# Altium PCB 电子脚铐手持式主控板V3.PcbDoc (part 3 of 3)
Units mm, origin at the board's own origin, x right, y up, seen from the top; angles counter-clockwise.
Board outline 100 x 95 mm, 2 copper layers (Top Layer, Bottom Layer); 124 components, 70 nets, 370 pads, 89 vias.
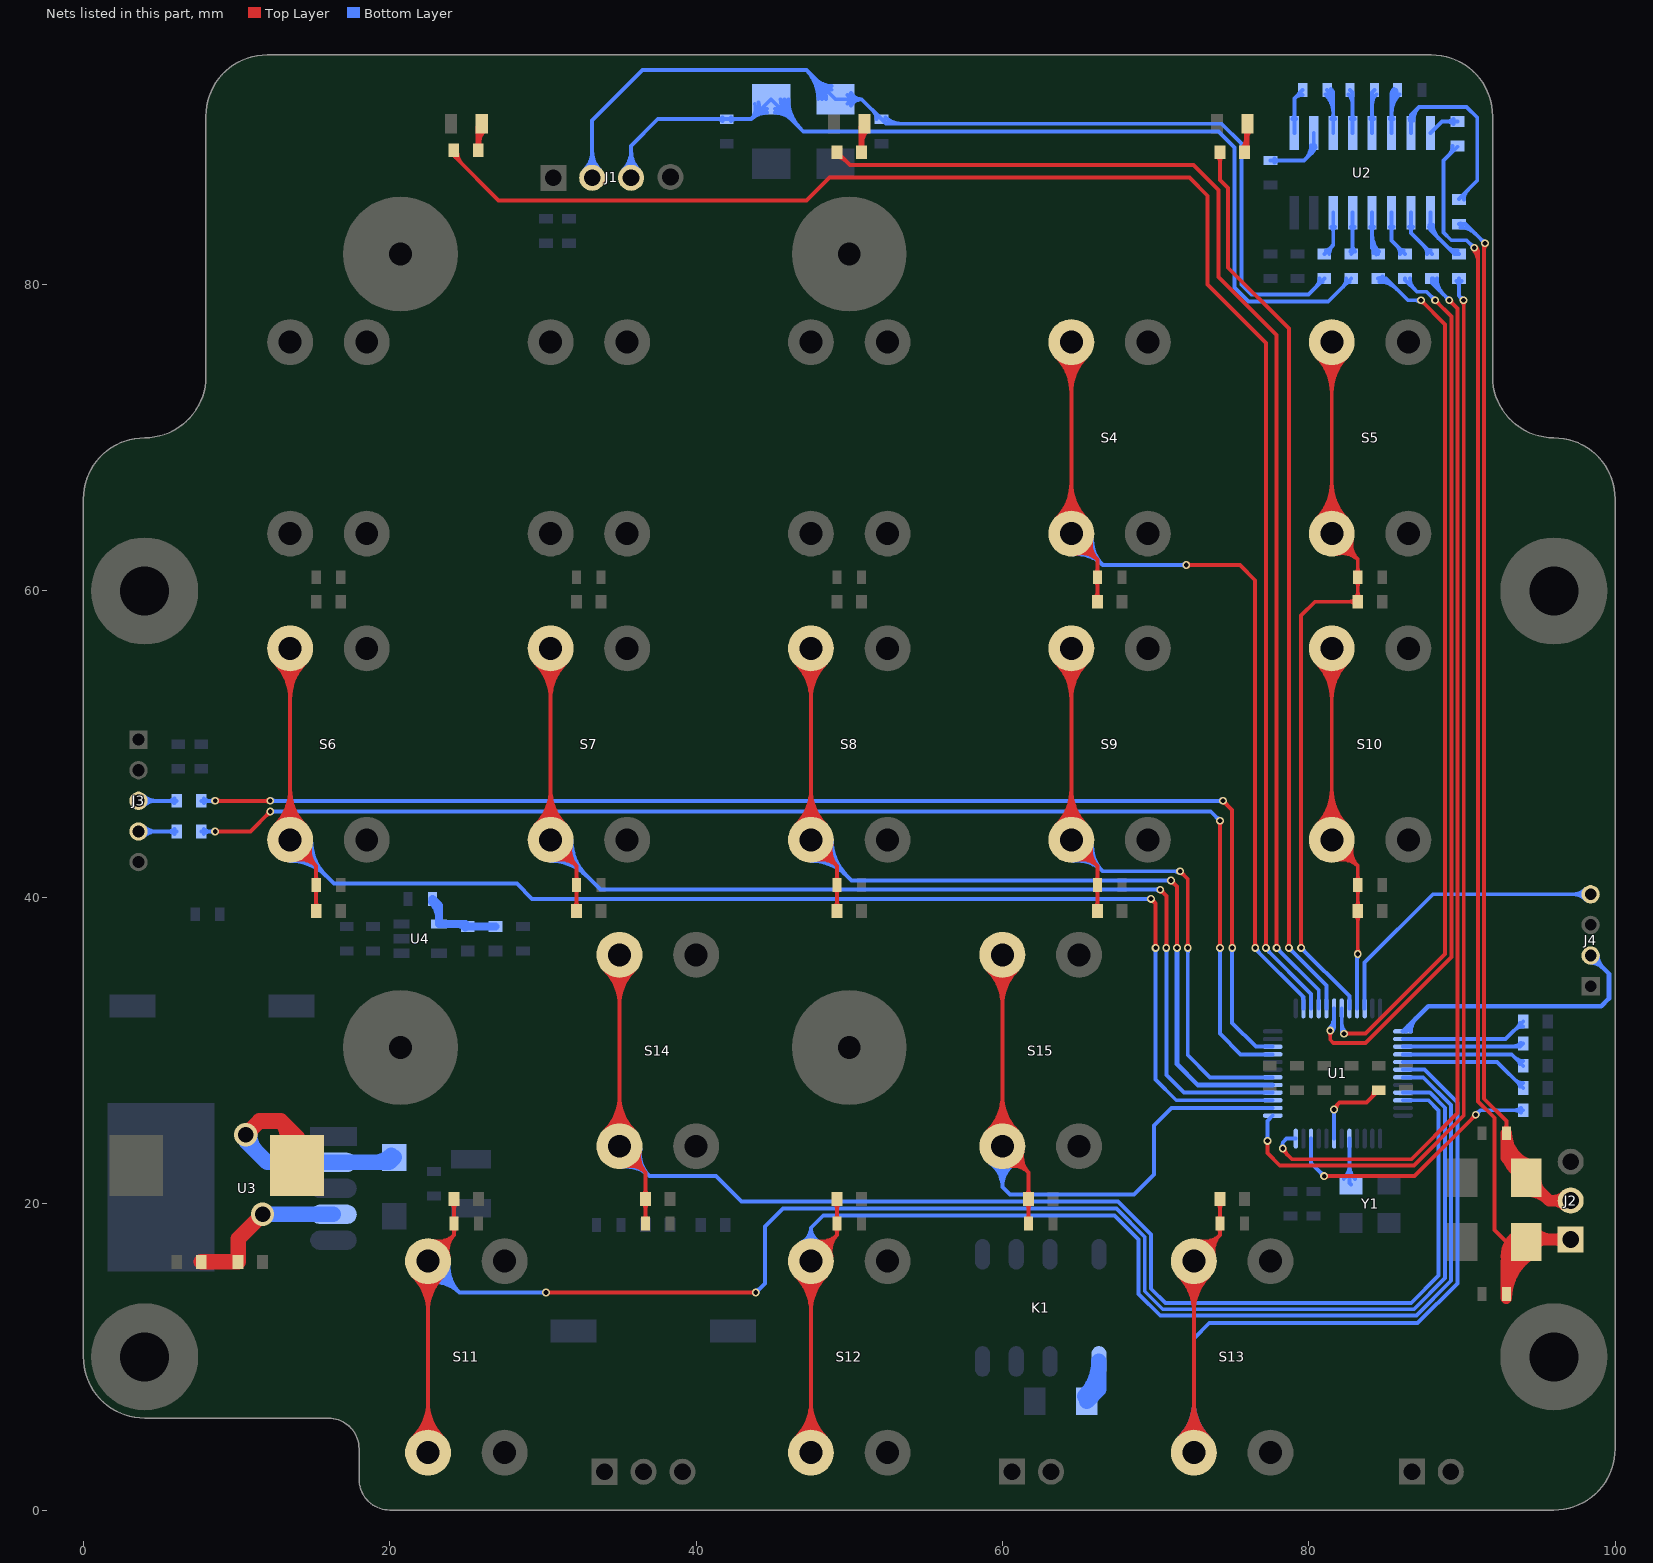
[diagram p3: the nets of this part, all layers, seen from the top]

## Via types
v1: diameter 0.508, hole 0.305, Top Layer to Bottom Layer, tented both sides, 75 vias
v2: diameter 0.762, hole 0.508, Top Layer to Bottom Layer, tented both sides, 9 vias
v3: diameter 1.524, hole 1.016, Top Layer to Bottom Layer, tented both sides, 5 vias

## Nets (pads, with @x,y where several pads share a name; then routed paths per layer and width w, separated by ;. In a path a pad name is that pad's centre, name@x,y a point inside that pad or via, vN(x,y) a via of type N, cw(c..) or ccw(c..) an arc to the next point about the centre after c; other vN are vias at no path point) (continued)
KEY3: C33.1 R23.1 S4.2 U1.26 | length 107.5
  Top Layer w0.254: S4.2@63.529,64.721 ccw(c61.185,67.065) 64.5,67.065 ccw(c67.815,67.065) S4.2@65.471,64.721 ; S4.2@63.529,75.279 cw(c61.185,72.935) 64.5,72.935 cw(c67.815,72.935) S4.2@65.471,75.279 ; S4.2@63.709,64.541 ccw(c61.799,66.451) 64.5,66.451 ccw(c67.202,66.451) S4.2@65.291,64.541 ; S4.2@63.709,75.459 cw(c61.799,73.548) 64.5,73.548 cw(c67.202,73.548) S4.2@65.291,75.459 ; S4.2@63.889,64.361 ccw(c62.412,65.838) 64.5,65.838 ccw(c66.588,65.838) S4.2@65.112,64.361 ; S4.2@63.889,75.638 cw(c62.412,74.162) 64.5,74.162 cw(c66.588,74.162) S4.2@65.112,75.638 ; S4.2@64.5,76.25 S4.2@64.5,63.75 66.2,62.05 ; S4.2@64.716,62.912 cw(c64.939,62.047) 65.571,62.679 cw(c66.203,63.311) S4.2@65.338,63.534 ; S4.2@64.78,62.666 cw(c65.068,61.547) 65.885,62.365 cw(c66.703,63.182) S4.2@65.584,63.47 ; S4.2@64.843,62.42 cw(c65.197,61.048) 66.2,62.05 ; S4.2@65.83,63.407 ccw(c67.202,63.053) 66.2,62.05 ; R23.1@66.042,59.558 ccw(c65.662,59.938) 66.2,59.938 ccw(c66.738,59.938) R23.1@66.358,59.558 ; C33.1@66.078,60.628 cw(c65.782,60.332) 66.2,60.332 cw(c66.618,60.332) C33.1@66.322,60.628 ; C33.1@66.078,61.172 ccw(c65.782,61.468) 66.2,61.468 ccw(c66.618,61.468) C33.1@66.322,61.172 ; R23.1@66.2,59.3 C33.1@66.2,60.9 66.2,62.05 ; v1(72,61.7) 75.5,61.7 76.5,60.7 v1(76.5,36.7) ; v1@72.09,61.61 cw(c72.307,61.393) 72.307,61.7 cw(c72.307,62.007) v1@72.09,61.79 ; v1@76.41,36.79 ccw(c76.193,37.007) 76.5,37.007 ccw(c76.807,37.007) v1@76.59,36.79
  Bottom Layer w0.254: S4.2@64.5,63.75 66.55,61.7 v1(72,61.7) ; S4.2@64.586,62.889 cw(c64.734,61.401) 65.792,62.458 cw(c66.849,63.516) S4.2@65.361,63.664 ; S4.2@64.611,62.636 cw(c64.803,60.711) 66.171,62.079 cw(c67.539,63.447) S4.2@65.614,63.639 ; S4.2@64.636,62.384 cw(c64.872,60.022) 66.55,61.7 cw(c68.228,63.378) S4.2@65.866,63.614 ; v1@71.91,61.61 ccw(c71.693,61.393) 71.693,61.7 ccw(c71.693,62.007) v1@71.91,61.79 ; v1(76.5,36.7) 76.5,36.646 79.65,33.496 U1.26@79.65,32.75 ; v1@76.627,36.7 ccw(c77.065,36.7) 76.755,36.39 ; 79.461,33.684 cw(c79.037,33.26) U1.26@79.637,33.26
KEY4: C34.1 R24.1 S5.2 U1.32 | length 85.3
  Top Layer w0.254: v1@79.41,36.79 ccw(c79.193,37.007) 79.5,37.007 ccw(c79.807,37.007) v1@79.59,36.79 ; v1(79.5,36.7) 79.5,58.4 80.4,59.3 R24.1@83.2,59.3 C34.1@83.2,60.9 83.2,62.05 ; S5.2@80.529,64.721 ccw(c78.185,67.065) 81.5,67.065 ccw(c84.815,67.065) S5.2@82.471,64.721 ; S5.2@80.529,75.279 cw(c78.185,72.935) 81.5,72.935 cw(c84.815,72.935) S5.2@82.471,75.279 ; S5.2@80.709,64.541 ccw(c78.799,66.451) 81.5,66.451 ccw(c84.202,66.451) S5.2@82.291,64.541 ; S5.2@80.709,75.459 cw(c78.799,73.548) 81.5,73.548 cw(c84.202,73.548) S5.2@82.291,75.459 ; S5.2@80.889,64.361 ccw(c79.412,65.838) 81.5,65.838 ccw(c83.588,65.838) S5.2@82.112,64.361 ; S5.2@80.889,75.638 cw(c79.412,74.162) 81.5,74.162 cw(c83.588,74.162) S5.2@82.112,75.638 ; S5.2@81.5,76.25 S5.2@81.5,63.75 83.2,62.05 ; S5.2@81.716,62.912 cw(c81.939,62.047) 82.571,62.679 cw(c83.203,63.311) S5.2@82.338,63.534 ; S5.2@81.78,62.666 cw(c82.068,61.548) 82.885,62.365 cw(c83.702,63.182) S5.2@82.584,63.47 ; S5.2@81.843,62.42 cw(c82.197,61.048) 83.2,62.05 ; S5.2@82.83,63.407 ccw(c84.202,63.053) 83.2,62.05 ; R24.1@83.042,59.142 ccw(c82.662,58.762) 82.662,59.3 ccw(c82.662,59.838) R24.1@83.042,59.458 ; R24.1@83.042,59.558 ccw(c82.662,59.938) 83.2,59.938 ccw(c83.738,59.938) R24.1@83.358,59.558 ; C34.1@83.078,60.628 cw(c82.782,60.332) 83.2,60.332 cw(c83.618,60.332) C34.1@83.322,60.628 ; C34.1@83.078,61.172 ccw(c82.782,61.468) 83.2,61.468 ccw(c83.618,61.468) C34.1@83.322,61.172
  Bottom Layer w0.254: v1@79.5,36.573 cw(c79.5,36.266) 79.717,36.483 cw(c79.934,36.7) v1@79.627,36.7 ; v1(79.5,36.7) 82.65,33.55 U1.32@82.65,32.75
KEY5: C35.1 R25.1 S6.2 U1.15 | length 145.3
  Top Layer w0.254: S6.2@12.529,44.721 ccw(c10.185,47.065) 13.5,47.065 ccw(c16.815,47.065) S6.2@14.471,44.721 ; S6.2@12.529,55.279 cw(c10.185,52.935) 13.5,52.935 cw(c16.815,52.935) S6.2@14.471,55.279 ; S6.2@12.709,44.541 ccw(c10.799,46.451) 13.5,46.451 ccw(c16.202,46.451) S6.2@14.291,44.541 ; S6.2@12.709,55.459 cw(c10.799,53.548) 13.5,53.548 cw(c16.202,53.548) S6.2@14.291,55.459 ; S6.2@12.889,44.361 ccw(c11.412,45.838) 13.5,45.838 ccw(c15.588,45.838) S6.2@14.112,44.361 ; S6.2@12.889,55.638 cw(c11.412,54.162) 13.5,54.162 cw(c15.588,54.162) S6.2@14.112,55.638 ; S6.2@13.5,56.25 S6.2@13.5,43.75 15.2,42.05 ; S6.2@13.716,42.912 cw(c13.939,42.047) 14.571,42.679 cw(c15.203,43.311) S6.2@14.338,43.534 ; S6.2@13.78,42.666 cw(c14.068,41.547) 14.885,42.364 cw(c15.703,43.182) S6.2@14.584,43.47 ; S6.2@13.843,42.42 cw(c14.197,41.047) 15.2,42.05 ; S6.2@14.83,43.407 ccw(c16.203,43.053) 15.2,42.05 ; R25.1@15.042,39.358 ccw(c14.662,39.738) 15.2,39.738 ccw(c15.738,39.738) R25.1@15.358,39.358 ; C35.1@15.078,40.528 cw(c14.782,40.232) 15.2,40.232 cw(c15.618,40.232) C35.1@15.322,40.528 ; C35.1@15.078,41.072 ccw(c14.782,41.368) 15.2,41.368 ccw(c15.618,41.368) C35.1@15.322,41.072 ; R25.1@15.2,39.1 C35.1@15.2,40.8 15.2,42.05 ; v1@69.7,39.773 cw(c69.7,39.466) 69.917,39.683 cw(c70.134,39.9) v1@69.827,39.9 ; v1(69.7,39.9) 70,39.6 v1(70,36.7) ; v1@69.91,36.79 ccw(c69.693,37.007) 70,37.007 ccw(c70.307,37.007) v1@70.09,36.79
  Bottom Layer w0.254: S6.2@13.5,42.377 cw(c13.5,39.062) 15.844,41.406 cw(c18.188,43.75) S6.2@14.873,43.75 ; S6.2@13.5,42.631 cw(c13.5,39.929) 15.41,41.84 cw(c17.321,43.75) S6.2@14.619,43.75 ; S6.2@13.5,42.885 cw(c13.5,40.797) 14.977,42.273 cw(c16.453,43.75) S6.2@14.365,43.75 ; S6.2@13.5,43.75 16.35,40.9 28.3,40.9 29.3,39.9 v1(69.7,39.9) ; v1@69.61,39.81 ccw(c69.393,39.593) 69.393,39.9 ccw(c69.393,40.207) v1@69.61,39.99 ; v1@69.91,36.61 cw(c69.693,36.393) 70,36.393 cw(c70.307,36.393) v1@70.09,36.61 ; v1(70,36.7) 70,28.1 71.35,26.75 U1.15@77.65,26.75
KEY6: C36.1 R26.1 S7.2 U1.16 | length 128.2
  Top Layer w0.254: S7.2@29.529,44.721 ccw(c27.185,47.065) 30.5,47.065 ccw(c33.815,47.065) S7.2@31.471,44.721 ; S7.2@29.529,55.279 cw(c27.185,52.935) 30.5,52.935 cw(c33.815,52.935) S7.2@31.471,55.279 ; S7.2@29.709,44.541 ccw(c27.799,46.451) 30.5,46.451 ccw(c33.202,46.451) S7.2@31.291,44.541 ; S7.2@29.709,55.459 cw(c27.799,53.548) 30.5,53.548 cw(c33.202,53.548) S7.2@31.291,55.459 ; S7.2@29.889,44.361 ccw(c28.412,45.838) 30.5,45.838 ccw(c32.588,45.838) S7.2@31.112,44.361 ; S7.2@29.889,55.638 cw(c28.412,54.162) 30.5,54.162 cw(c32.588,54.162) S7.2@31.112,55.638 ; S7.2@30.5,56.25 S7.2@30.5,43.75 32.2,42.05 ; S7.2@30.716,42.912 cw(c30.939,42.047) 31.571,42.679 cw(c32.203,43.311) S7.2@31.338,43.534 ; S7.2@30.78,42.666 cw(c31.068,41.547) 31.885,42.365 cw(c32.703,43.182) S7.2@31.584,43.47 ; S7.2@30.843,42.42 cw(c31.197,41.048) 32.2,42.05 ; S7.2@31.83,43.407 ccw(c33.202,43.053) 32.2,42.05 ; R26.1@32.042,39.358 ccw(c31.662,39.738) 32.2,39.738 ccw(c32.738,39.738) R26.1@32.358,39.358 ; C36.1@32.078,40.528 cw(c31.782,40.232) 32.2,40.232 cw(c32.618,40.232) C36.1@32.322,40.528 ; C36.1@32.078,41.072 ccw(c31.782,41.368) 32.2,41.368 ccw(c32.618,41.368) C36.1@32.322,41.072 ; R26.1@32.2,39.1 C36.1@32.2,40.8 32.2,42.05 ; v1@70.3,40.373 cw(c70.3,40.066) 70.517,40.283 cw(c70.734,40.5) v1@70.427,40.5 ; v1(70.3,40.5) 70.7,40.1 v1(70.7,36.7) ; v1@70.61,36.79 ccw(c70.393,37.007) 70.7,37.007 ccw(c71.007,37.007) v1@70.79,36.79
  Bottom Layer w0.254: S7.2@30.5,42.377 cw(c30.5,39.062) 32.844,41.406 cw(c35.188,43.75) S7.2@31.873,43.75 ; S7.2@30.5,42.631 cw(c30.5,39.929) 32.41,41.84 cw(c34.321,43.75) S7.2@31.619,43.75 ; S7.2@30.5,42.885 cw(c30.5,40.797) 31.977,42.273 cw(c33.453,43.75) S7.2@31.365,43.75 ; S7.2@30.5,43.75 33.75,40.5 v1(70.3,40.5) ; v1@70.21,40.41 ccw(c69.993,40.193) 69.993,40.5 ccw(c69.993,40.807) v1@70.21,40.59 ; v1@70.61,36.61 cw(c70.393,36.393) 70.7,36.393 cw(c71.007,36.393) v1@70.79,36.61 ; v1(70.7,36.7) 70.7,28.4 71.85,27.25 U1.16@77.65,27.25
KEY7: C37.1 R27.1 S8.2 U1.17 | length 110.4
  Top Layer w0.254: S8.2@46.529,44.721 ccw(c44.185,47.065) 47.5,47.065 ccw(c50.815,47.065) S8.2@48.471,44.721 ; S8.2@46.529,55.279 cw(c44.185,52.935) 47.5,52.935 cw(c50.815,52.935) S8.2@48.471,55.279 ; S8.2@46.709,44.541 ccw(c44.799,46.451) 47.5,46.451 ccw(c50.202,46.451) S8.2@48.291,44.541 ; S8.2@46.709,55.459 cw(c44.799,53.548) 47.5,53.548 cw(c50.202,53.548) S8.2@48.291,55.459 ; S8.2@46.889,44.361 ccw(c45.412,45.838) 47.5,45.838 ccw(c49.588,45.838) S8.2@48.112,44.361 ; S8.2@46.889,55.638 cw(c45.412,54.162) 47.5,54.162 cw(c49.588,54.162) S8.2@48.112,55.638 ; S8.2@47.5,56.25 S8.2@47.5,43.75 49.2,42.05 ; S8.2@47.716,42.912 cw(c47.939,42.047) 48.571,42.679 cw(c49.203,43.311) S8.2@48.338,43.534 ; S8.2@47.78,42.666 cw(c48.068,41.547) 48.885,42.365 cw(c49.703,43.182) S8.2@48.584,43.47 ; S8.2@47.843,42.42 cw(c48.197,41.048) 49.2,42.05 ; S8.2@48.83,43.407 ccw(c50.202,43.053) 49.2,42.05 ; R27.1@49.042,39.358 ccw(c48.662,39.738) 49.2,39.738 ccw(c49.738,39.738) R27.1@49.358,39.358 ; C37.1@49.078,40.528 cw(c48.782,40.232) 49.2,40.232 cw(c49.618,40.232) C37.1@49.322,40.528 ; C37.1@49.078,41.072 ccw(c48.782,41.368) 49.2,41.368 ccw(c49.618,41.368) C37.1@49.322,41.072 ; R27.1@49.2,39.1 C37.1@49.2,40.8 49.2,42.05 ; v1@71,40.973 cw(c71,40.666) 71.217,40.883 cw(c71.434,41.1) v1@71.127,41.1 ; v1(71,41.1) 71.4,40.7 v1(71.4,36.7) ; v1@71.31,36.79 ccw(c71.093,37.007) 71.4,37.007 ccw(c71.707,37.007) v1@71.49,36.79
  Bottom Layer w0.254: S8.2@47.5,42.377 cw(c47.5,39.062) 49.844,41.406 cw(c52.188,43.75) S8.2@48.873,43.75 ; S8.2@47.5,42.631 cw(c47.5,39.929) 49.41,41.84 cw(c51.321,43.75) S8.2@48.619,43.75 ; S8.2@47.5,42.885 cw(c47.5,40.797) 48.977,42.273 cw(c50.453,43.75) S8.2@48.365,43.75 ; S8.2@47.5,43.75 50.15,41.1 v1(71,41.1) ; v1@70.91,41.01 ccw(c70.693,40.793) 70.693,41.1 ccw(c70.693,41.407) v1@70.91,41.19
  Bottom Layer w0.305: v1(71.4,36.7) 71.4,29.1 72.75,27.75 U1.17@77.65,27.75
KEY8: C38.1 R28.1 S9.2 U1.18 | length 91.2
  Top Layer w0.254: S9.2@63.529,44.721 ccw(c61.185,47.065) 64.5,47.065 ccw(c67.815,47.065) S9.2@65.471,44.721 ; S9.2@63.529,55.279 cw(c61.185,52.935) 64.5,52.935 cw(c67.815,52.935) S9.2@65.471,55.279 ; S9.2@63.709,44.541 ccw(c61.799,46.451) 64.5,46.451 ccw(c67.202,46.451) S9.2@65.291,44.541 ; S9.2@63.709,55.459 cw(c61.799,53.548) 64.5,53.548 cw(c67.202,53.548) S9.2@65.291,55.459 ; S9.2@63.889,44.361 ccw(c62.412,45.838) 64.5,45.838 ccw(c66.588,45.838) S9.2@65.112,44.361 ; S9.2@63.889,55.638 cw(c62.412,54.162) 64.5,54.162 cw(c66.588,54.162) S9.2@65.112,55.638 ; S9.2@64.5,56.25 S9.2@64.5,43.75 66.2,42.05 ; S9.2@64.716,42.912 cw(c64.939,42.047) 65.571,42.679 cw(c66.203,43.311) S9.2@65.338,43.534 ; S9.2@64.78,42.666 cw(c65.068,41.547) 65.885,42.365 cw(c66.703,43.182) S9.2@65.584,43.47 ; S9.2@64.843,42.42 cw(c65.197,41.048) 66.2,42.05 ; S9.2@65.83,43.407 ccw(c67.202,43.053) 66.2,42.05 ; R28.1@66.042,39.358 ccw(c65.662,39.738) 66.2,39.738 ccw(c66.738,39.738) R28.1@66.358,39.358 ; C38.1@66.078,40.528 cw(c65.782,40.232) 66.2,40.232 cw(c66.618,40.232) C38.1@66.322,40.528 ; C38.1@66.078,41.072 ccw(c65.782,41.368) 66.2,41.368 ccw(c66.618,41.368) C38.1@66.322,41.072 ; R28.1@66.2,39.1 C38.1@66.2,40.8 66.2,42.05 ; v1@71.6,41.573 cw(c71.6,41.266) 71.817,41.483 cw(c72.034,41.7) v1@71.727,41.7 ; v1(71.6,41.7) 72.1,41.2 v1(72.1,36.7) ; v1@72.01,36.79 ccw(c71.793,37.007) 72.1,37.007 ccw(c72.407,37.007) v1@72.19,36.79
  Bottom Layer w0.254: S9.2@64.5,43.75 66.55,41.7 ; S9.2@64.586,42.889 cw(c64.734,41.401) 65.792,42.458 cw(c66.849,43.516) S9.2@65.361,43.664 ; S9.2@64.611,42.636 cw(c64.803,40.712) 66.171,42.079 cw(c67.538,43.447) S9.2@65.614,43.639 ; S9.2@64.636,42.384 cw(c64.872,40.022) 66.55,41.7 ; S9.2@65.866,43.614 ccw(c68.228,43.378) 66.55,41.7 ; v1@71.51,41.61 ccw(c71.293,41.393) 71.293,41.7 ccw(c71.293,42.007) v1@71.51,41.79 ; v1(71.6,41.7) 66.55,41.7 ; v1@72.01,36.61 cw(c71.793,36.393) 72.1,36.393 cw(c72.407,36.393) v1@72.19,36.61 ; v1(72.1,36.7) 72.1,29.7 73.55,28.25 U1.18@77.65,28.25
KEY9: C39.1 R29.1 S10.2 U1.33 | length 60.7
  Top Layer w0.254: S10.2@80.529,44.721 ccw(c78.185,47.065) 81.5,47.065 ccw(c84.815,47.065) S10.2@82.471,44.721 ; S10.2@80.529,55.279 cw(c78.185,52.935) 81.5,52.935 cw(c84.815,52.935) S10.2@82.471,55.279 ; S10.2@80.709,44.541 ccw(c78.799,46.451) 81.5,46.451 ccw(c84.202,46.451) S10.2@82.291,44.541 ; S10.2@80.709,55.459 cw(c78.799,53.548) 81.5,53.548 cw(c84.202,53.548) S10.2@82.291,55.459 ; S10.2@80.889,44.361 ccw(c79.412,45.838) 81.5,45.838 ccw(c83.588,45.838) S10.2@82.112,44.361 ; S10.2@80.889,55.638 cw(c79.412,54.162) 81.5,54.162 cw(c83.588,54.162) S10.2@82.112,55.638 ; S10.2@81.5,56.25 S10.2@81.5,43.75 83.2,42.05 ; S10.2@81.716,42.912 cw(c81.939,42.047) 82.571,42.679 cw(c83.203,43.311) S10.2@82.338,43.534 ; S10.2@81.78,42.666 cw(c82.068,41.548) 82.885,42.365 cw(c83.702,43.182) S10.2@82.584,43.47 ; S10.2@81.843,42.42 cw(c82.197,41.048) 83.2,42.05 ; S10.2@82.83,43.407 ccw(c84.202,43.053) 83.2,42.05 ; R29.1@83.042,38.842 cw(c82.662,38.462) 83.2,38.462 cw(c83.738,38.462) R29.1@83.358,38.842 ; R29.1@83.042,39.358 ccw(c82.662,39.738) 83.2,39.738 ccw(c83.738,39.738) R29.1@83.358,39.358 ; C39.1@83.078,40.528 cw(c82.782,40.232) 83.2,40.232 cw(c83.618,40.232) C39.1@83.322,40.528 ; C39.1@83.078,41.072 ccw(c82.782,41.368) 83.2,41.368 ccw(c83.618,41.368) C39.1@83.322,41.072 ; v1@83.11,36.39 ccw(c82.893,36.607) 83.2,36.607 ccw(c83.507,36.607) v1@83.29,36.39 ; v1(83.2,36.3) R29.1@83.2,39.1 C39.1@83.2,40.8 83.2,42.05
  Bottom Layer w0.254: U1.33@83.15,32.75 v1@83.15,36.25 ; 83.15,35.873 cw(c83.627,35.873) v1@83.29,36.21
KEY10: C40.1 R30.1 S11.2 U1.45 | length 155.9
  Top Layer w0.254: S11.2@21.529,4.721 ccw(c19.185,7.065) 22.5,7.065 ccw(c25.815,7.065) S11.2@23.471,4.721 ; S11.2@21.529,15.279 cw(c19.185,12.935) 22.5,12.935 cw(c25.815,12.935) S11.2@23.471,15.279 ; S11.2@21.709,4.541 ccw(c19.799,6.451) 22.5,6.451 ccw(c25.202,6.451) S11.2@23.291,4.541 ; S11.2@21.709,15.459 cw(c19.799,13.548) 22.5,13.548 cw(c25.202,13.548) S11.2@23.291,15.459 ; S11.2@21.889,4.361 ccw(c20.412,5.838) 22.5,5.838 ccw(c24.588,5.838) S11.2@23.112,4.361 ; S11.2@21.889,15.638 cw(c20.412,14.161) 22.5,14.161 cw(c24.588,14.161) S11.2@23.112,15.638 ; S11.2@22.5,3.75 S11.2@22.5,16.25 24.2,17.95 C40.1@24.2,18.7 R30.1@24.2,20.3 ; S11.2@22.716,17.087 ccw(c22.939,17.952) 23.571,17.321 ccw(c24.203,16.689) S11.2@23.338,16.466 ; S11.2@22.78,17.333 ccw(c23.068,18.452) 23.885,17.635 ccw(c24.703,16.818) S11.2@23.584,16.529 ; S11.2@22.843,17.579 ccw(c23.197,18.952) 24.2,17.95 ccw(c25.202,16.947) S11.2@23.83,16.593 ; R30.1@24.042,20.042 cw(c23.662,19.662) 24.2,19.662 cw(c24.738,19.662) R30.1@24.358,20.042 ; C40.1@24.078,18.428 cw(c23.782,18.132) 24.2,18.132 cw(c24.618,18.132) C40.1@24.322,18.428 ; C40.1@24.078,18.972 ccw(c23.782,19.268) 24.2,19.268 ccw(c24.618,19.268) C40.1@24.322,18.972 ; v1(30.2,14.2) v1(43.9,14.2) ; v1@30.29,14.11 cw(c30.507,13.893) 30.507,14.2 cw(c30.507,14.507) v1@30.29,14.29 ; v1@43.81,14.11 ccw(c43.593,13.893) 43.593,14.2 ccw(c43.593,14.507) v1@43.81,14.29
  Bottom Layer w0.254: S11.2@22.5,16.25 24.55,14.2 ; S11.2@22.586,15.389 cw(c22.734,13.901) 23.791,14.958 cw(c24.849,16.016) S11.2@23.361,16.164 ; S11.2@22.611,15.136 cw(c22.803,13.211) 24.171,14.579 cw(c25.538,15.947) S11.2@23.614,16.139 ; S11.2@22.636,14.884 cw(c22.872,12.522) 24.55,14.2 ; S11.2@23.866,16.114 ccw(c26.228,15.878) 24.55,14.2 ; v1@30.11,14.11 ccw(c29.893,13.893) 29.893,14.2 ccw(c29.893,14.507) v1@30.11,14.29 ; v1(30.2,14.2) 24.55,14.2 ; v1(43.9,14.2) 44.5,14.8 44.5,18.5 45.686,19.686 67.44,19.686 69.294,17.832 69.294,14.281 70.468,13.106 86.857,13.106 88.887,15.137 88.887,26.263 87.901,27.25 U1.45@86.15,27.25 ; v1@43.9,14.327 ccw(c43.9,14.634) 44.117,14.417 ccw(c44.334,14.2) v1@44.027,14.2
KEY11: C41.1 R31.1 S12.2 U1.43 | length 121.7
  Top Layer w0.254: S12.2@46.529,4.721 ccw(c44.185,7.065) 47.5,7.065 ccw(c50.815,7.065) S12.2@48.471,4.721 ; S12.2@46.529,15.279 cw(c44.185,12.935) 47.5,12.935 cw(c50.815,12.935) S12.2@48.471,15.279 ; S12.2@46.709,4.541 ccw(c44.799,6.451) 47.5,6.451 ccw(c50.202,6.451) S12.2@48.291,4.541 ; S12.2@46.709,15.459 cw(c44.799,13.548) 47.5,13.548 cw(c50.202,13.548) S12.2@48.291,15.459 ; S12.2@46.889,4.361 ccw(c45.412,5.838) 47.5,5.838 ccw(c49.588,5.838) S12.2@48.112,4.361 ; S12.2@46.889,15.638 cw(c45.412,14.161) 47.5,14.161 cw(c49.588,14.161) S12.2@48.112,15.638 ; S12.2@47.5,3.75 S12.2@47.5,16.25 49.2,17.95 C41.1@49.2,18.7 R31.1@49.2,20.3 ; S12.2@47.716,17.087 ccw(c47.939,17.952) 48.571,17.321 ccw(c49.203,16.689) S12.2@48.338,16.466 ; S12.2@47.78,17.333 ccw(c48.068,18.452) 48.885,17.635 ccw(c49.703,16.818) S12.2@48.584,16.529 ; S12.2@47.843,17.579 ccw(c48.197,18.952) 49.2,17.95 ccw(c50.202,16.947) S12.2@48.83,16.593 ; R31.1@49.042,20.042 cw(c48.662,19.662) 49.2,19.662 cw(c49.738,19.662) R31.1@49.358,20.042 ; C41.1@49.078,18.428 cw(c48.782,18.132) 49.2,18.132 cw(c49.618,18.132) C41.1@49.322,18.428 ; C41.1@49.078,18.972 ccw(c48.782,19.268) 49.2,19.268 ccw(c49.618,19.268) C41.1@49.322,18.972
  Bottom Layer w0.254: S12.2@46.908,17.488 ccw(c46.458,18.429) 47.5,18.429 ; S12.2@47.017,17.259 ccw(c46.651,18.025) 47.5,18.025 ccw(c48.35,18.025) S12.2@47.983,17.259 ; S12.2@47.5,16.25 47.5,18.429 ; S12.2@48.093,17.488 cw(c48.542,18.429) 47.5,18.429 ; U1.43@86.15,28.25 87.475,28.25 89.294,26.432 89.294,14.968 87.025,12.7 70.3,12.7 68.887,14.113 68.887,17.663 67.322,19.228 48.3,19.228 47.5,18.429
KEY12: C42.1 R32.1 S13.2 U1.42 | length 107.2
  Top Layer w0.254: S13.2@71.529,4.721 ccw(c69.185,7.065) 72.5,7.065 ccw(c75.815,7.065) S13.2@73.471,4.721 ; S13.2@71.529,15.279 cw(c69.185,12.935) 72.5,12.935 cw(c75.815,12.935) S13.2@73.471,15.279 ; S13.2@71.709,4.541 ccw(c69.799,6.451) 72.5,6.451 ccw(c75.202,6.451) S13.2@73.291,4.541 ; S13.2@71.709,15.459 cw(c69.799,13.548) 72.5,13.548 cw(c75.202,13.548) S13.2@73.291,15.459 ; S13.2@71.889,4.361 ccw(c70.412,5.838) 72.5,5.838 ccw(c74.588,5.838) S13.2@73.112,4.361 ; S13.2@71.889,15.638 cw(c70.412,14.161) 72.5,14.161 cw(c74.588,14.161) S13.2@73.112,15.638 ; S13.2@72.5,3.75 S13.2@72.5,16.25 74.2,17.95 C42.1@74.2,18.7 R32.1@74.2,20.3 ; S13.2@72.716,17.087 ccw(c72.939,17.952) 73.571,17.321 ccw(c74.203,16.689) S13.2@73.338,16.466 ; S13.2@72.78,17.333 ccw(c73.068,18.452) 73.885,17.635 ccw(c74.703,16.818) S13.2@73.584,16.529 ; S13.2@72.843,17.579 ccw(c73.197,18.952) 74.2,17.95 ccw(c75.202,16.947) S13.2@73.83,16.593 ; R32.1@74.042,20.042 cw(c73.662,19.662) 74.2,19.662 cw(c74.738,19.662) R32.1@74.358,20.042 ; C42.1@74.078,18.428 cw(c73.782,18.132) 74.2,18.132 cw(c74.618,18.132) C42.1@74.322,18.428 ; C42.1@74.078,18.972 ccw(c73.782,19.268) 74.2,19.268 ccw(c74.618,19.268) C42.1@74.322,18.972
  Bottom Layer w0.254: S13.2@71.529,4.721 ccw(c69.185,7.065) 72.5,7.065 ccw(c75.815,7.065) S13.2@73.471,4.721 ; S13.2@71.709,4.541 ccw(c69.799,6.451) 72.5,6.451 ccw(c75.202,6.451) S13.2@73.291,4.541 ; S13.2@71.889,4.361 ccw(c70.412,5.838) 72.5,5.838 ccw(c74.588,5.838) S13.2@73.112,4.361 ; S13.2@72.5,3.75 72.5,11.2 73.5,12.2 87.1,12.2 89.7,14.8 89.7,26.6 87.55,28.75 U1.42@86.15,28.75
KEYDELETE: C44.1 R34.1 S15.2 U1.14 | length 86.7
  Top Layer w0.254: S15.2@59.029,24.721 ccw(c56.685,27.065) 60,27.065 ccw(c63.315,27.065) S15.2@60.971,24.721 ; S15.2@59.029,35.279 cw(c56.685,32.935) 60,32.935 cw(c63.315,32.935) S15.2@60.971,35.279 ; S15.2@59.209,24.541 ccw(c57.299,26.451) 60,26.451 ccw(c62.702,26.451) S15.2@60.791,24.541 ; S15.2@59.209,35.459 cw(c57.299,33.548) 60,33.548 cw(c62.702,33.548) S15.2@60.791,35.459 ; S15.2@59.389,24.361 ccw(c57.912,25.838) 60,25.838 ccw(c62.088,25.838) S15.2@60.612,24.361 ; S15.2@59.389,35.638 cw(c57.912,34.162) 60,34.162 cw(c62.088,34.162) S15.2@60.612,35.638 ; S15.2@60,36.25 S15.2@60,23.75 61.7,22.05 ; S15.2@60.216,22.912 cw(c60.439,22.047) 61.071,22.679 cw(c61.703,23.311) S15.2@60.838,23.534 ; S15.2@60.28,22.666 cw(c60.568,21.547) 61.385,22.364 cw(c62.203,23.182) S15.2@61.084,23.47 ; S15.2@60.343,22.42 cw(c60.697,21.048) 61.7,22.05 ; S15.2@61.33,23.407 ccw(c62.702,23.053) 61.7,22.05 ; R34.1@61.542,20.042 cw(c61.162,19.662) 61.7,19.662 cw(c62.238,19.662) R34.1@61.858,20.042 ; R34.1@61.542,20.558 ccw(c61.162,20.938) 61.7,20.938 ccw(c62.238,20.938) R34.1@61.858,20.558 ; C44.1@61.578,18.972 ccw(c61.282,19.268) 61.7,19.268 ccw(c62.118,19.268) C44.1@61.822,18.972 ; C44.1@61.7,18.7 R34.1@61.7,20.3 61.7,22.05
  Bottom Layer w0.254: S15.2@59.208,22.628 cw(c58.13,21.1) 60,21.1 ; S15.2@59.355,22.836 cw(c58.476,21.59) 60,21.59 cw(c61.525,21.59) S15.2@60.646,22.836 ; S15.2@59.501,23.043 cw(c58.822,22.08) 60,22.08 cw(c61.179,22.08) S15.2@60.499,23.043 ; S15.2@60,23.75 60,21.1 ; S15.2@60.792,22.628 ccw(c61.871,21.1) 60,21.1 ; U1.14@77.65,26.25 71.05,26.25 69.9,25.1 69.9,21.9 68.6,20.6 60.5,20.6 60,21.1
KEYENTER: C43.1 R33.1 S14.2 U1.46 | length 136.6
  Top Layer w0.254: S14.2@34.029,24.721 ccw(c31.685,27.065) 35,27.065 ccw(c38.315,27.065) S14.2@35.971,24.721 ; S14.2@34.029,35.279 cw(c31.685,32.935) 35,32.935 cw(c38.315,32.935) S14.2@35.971,35.279 ; S14.2@34.209,24.541 ccw(c32.299,26.451) 35,26.451 ccw(c37.702,26.451) S14.2@35.791,24.541 ; S14.2@34.209,35.459 cw(c32.299,33.548) 35,33.548 cw(c37.702,33.548) S14.2@35.791,35.459 ; S14.2@34.389,24.361 ccw(c32.912,25.838) 35,25.838 ccw(c37.088,25.838) S14.2@35.612,24.361 ; S14.2@34.389,35.638 cw(c32.912,34.162) 35,34.162 cw(c37.088,34.162) S14.2@35.612,35.638 ; S14.2@35,36.25 S14.2@35,23.75 36.7,22.05 ; S14.2@35.216,22.912 cw(c35.439,22.047) 36.071,22.679 cw(c36.703,23.311) S14.2@35.838,23.534 ; S14.2@35.28,22.666 cw(c35.568,21.547) 36.385,22.364 cw(c37.203,23.182) S14.2@36.084,23.47 ; S14.2@35.343,22.42 cw(c35.697,21.048) 36.7,22.05 ; S14.2@36.33,23.407 ccw(c37.702,23.053) 36.7,22.05 ; R33.1@36.542,20.042 cw(c36.162,19.662) 36.7,19.662 cw(c37.238,19.662) R33.1@36.858,20.042 ; R33.1@36.542,20.558 ccw(c36.162,20.938) 36.7,20.938 ccw(c37.238,20.938) R33.1@36.858,20.558 ; C43.1@36.578,18.972 ccw(c36.282,19.268) 36.7,19.268 ccw(c37.118,19.268) C43.1@36.822,18.972 ; C43.1@36.7,18.7 R33.1@36.7,20.3 36.7,22.05
  Bottom Layer w0.254: S14.2@35,23.75 36.95,21.8 ; S14.2@35.12,22.893 cw(c35.301,21.594) 36.229,22.521 cw(c37.156,23.449) S14.2@35.857,23.63 ; S14.2@35.155,22.642 cw(c35.389,20.961) 36.589,22.161 cw(c37.789,23.361) S14.2@36.108,23.595 ; S14.2@35.19,22.39 cw(c35.478,20.328) 36.95,21.8 ; S14.2@36.36,23.56 ccw(c38.422,23.272) 36.95,21.8 ; U1.46@86.15,26.75 87.826,26.75 88.481,26.095 88.481,15.305 86.689,13.513 70.637,13.513 69.7,14.449 69.7,18 67.557,20.143 42.957,20.143 41.3,21.8 36.95,21.8
NetC18_1: C18.1 R12.2 R13.1 U4.4 | length 8.4
  Bottom Layer w0.508: C18.1@22.767,39.717 cw(c21.663,38.613) 23.225,38.613 ; C18.1@22.797,39.704 cw(c22.763,39.244) 23.225,39.244 ; C18.1@22.8,39.704 cw(c22.8,39.231) 23.135,39.565 ; C18.1@22.8,39.9 23.225,39.475 U4.4@23.225,38.25 24.95,38.25 R12.2@25.1,38.1 R13.1@26.9,38.1 ; 24.406,38.25 cw(c24.406,37.506) R12.2@24.932,38.032
NetC22_1: C22.1 U2.1 | length 4.3
  Bottom Layer w0.254: U2.1@78.933,90.822 ccw(c78.637,91.118) 79.055,91.118 ccw(c79.473,91.118) U2.1@79.177,90.822 ; U2.1@79.055,89.9 79.055,92.155 ; C22.1@79.598,92.377 ccw(c79.591,91.619) 79.055,92.155 ; C22.1@79.6,92.7 79.055,92.155
NetC22_2: C22.2 U2.3 | length 6.7
  Bottom Layer w0.254: C22.2@81.078,92.428 cw(c79.829,91.179) 81.595,91.179 ; C22.2@81.2,92.7 81.595,92.305 ; C22.2@81.254,92.386 cw(c81.359,92.069) 81.595,92.305 ; C22.2@81.257,92.607 cw(c80.442,91.792) 81.595,91.792 ; C22.2@81.437,92.787 cw(c81.055,92.405) 81.595,92.405 ; U2.3@81.473,90.822 ccw(c81.177,91.118) 81.595,91.118 ccw(c82.013,91.118) U2.3@81.717,90.822 ; U2.3@81.595,89.9 81.595,92.305
NetC23_2: C23.2 U2.2 | length 7.1
  Bottom Layer w0.254: C23.2@77.5,88.1 79.7,88.1 80.325,88.725 ; C23.2@77.772,87.978 cw(c78.068,87.682) 78.068,88.1 cw(c78.068,88.518) C23.2@77.772,88.222 ; 79.765,88.165 ccw(c78.829,89.1) U2.2@80.152,89.1 ; 80.198,88.598 ccw(c79.696,89.1) U2.2@80.406,89.1 ; U2.2@80.213,88.968 cw(c80.005,88.725) 80.325,88.725 ; U2.2@80.325,89.9 80.325,88.725 ; U2.2@80.437,88.968 ccw(c80.645,88.725) 80.325,88.725
NetC24_1: C24.1 U2.4 | length 4.3
  Bottom Layer w0.254: C24.1@82.578,92.428 cw(c81.884,91.734) 82.865,91.734 ; C24.1@82.7,92.7 82.865,92.535 U2.4@82.865,89.9 ; U2.4@82.743,90.822 ccw(c82.447,91.118) 82.865,91.118 ccw(c83.283,91.118) U2.4@82.987,90.822
NetC24_2: C24.2 U2.5 | length 4.3
  Bottom Layer w0.254: U2.5@84.013,90.822 ccw(c83.717,91.118) 84.135,91.118 ccw(c84.553,91.118) U2.5@84.257,90.822 ; U2.5@84.135,89.9 84.135,92.535 C24.2@84.3,92.7 ; 84.135,91.734 cw(c85.116,91.734) C24.2@84.422,92.428
NetC29_2: C29.2 U2.6 | length 6.6
  Bottom Layer w0.254: U2.6@85.283,90.822 ccw(c84.987,91.118) 85.405,91.118 ccw(c85.823,91.118) U2.6@85.527,90.822 ; U2.6@85.405,89.9 85.405,92.405 ; 85.405,91.179 cw(c87.171,91.179) C29.2@85.922,92.428 ; 85.405,91.792 cw(c86.558,91.792) C29.2@85.743,92.607 ; C29.2@85.563,92.787 ccw(c85.945,92.405) 85.405,92.405 ; C29.2@85.689,92.417 ccw(c85.554,92.256) 85.405,92.405 ; C29.2@85.7,92.7 85.405,92.405
NetD1_2: D1.2 R1.2 | length 3
  Top Layer w0.381: R1.2@75.687,88.859 ccw(c75.063,89.483) 75.946,89.483 ; R1.2@75.946,88.646 D1.2@75.946,90.446 ; 75.946,89.613 cw(c76.637,89.613) D1.2@76.148,90.102
NetD2_2: D2.2 R2.2 | length 3.2
  Top Layer w0.381: R2.2@50.687,88.859 ccw(c50.415,89.131) 50.8,89.131 ccw(c51.185,89.131) R2.2@50.913,88.859 ; R2.2@50.8,88.646 D2.2@50.8,90.3 ; 50.8,89.261 cw(c51.989,89.261) D2.2@51.148,90.102
NetD3_2: D3.2 R3.2 | length 3.4
  Top Layer w0.381: R3.2@25.668,88.986 ccw(c25.396,89.258) 25.781,89.258 ccw(c26.166,89.258) R3.2@25.894,88.986 ; R3.2@25.781,88.773 25.781,90.281 D3.2@26,90.5 ; R3.2@25.781,89.215 cw(c27.035,89.215) D3.2@26.148,90.102
NetD4_2: D4.2 K1.1 | length 6.2
  Bottom Layer w1.016: D4.2@65.364,7.436 ccw(c63.105,9.695) K1.1@66.3,9.695 ; D4.2@65.5,7.1 66.3,7.9 K1.1@66.3,9.7 ; D4.2@65.5,7.492 ccw(c65.5,8.438) D4.2@66.169,7.769
NetD5_2: D5.2 L1.1 U3.2 | length 23.2
  Top Layer w1.016: v3(10.6,24.5) 11.5,25.4 12.9,25.4 ; L1.1@12.991,23.539 ccw(c11.92,24.419) 12.9,25.4 ; 13.692,24.608 cw(c12.789,23.705) L1.1@13.775,22.894 ; L1.1@13.95,22.5 13.95,24.35 12.9,25.4
  Bottom Layer w1.016: v3(10.6,24.5) 10.6,24.1 12.007,22.693 U3.2@16.324,22.693 19.968,22.693 D5.2@20.3,23.025 ; v3@10.854,24.5 ccw(c12.433,24.5) 11.316,23.384 ; 18.975,22.693 ccw(c18.975,24.275) D5.2@20.094,23.156
NetJ3_3: J3.3 R35.1 | length 5.1
  Bottom Layer w0.254: J3.3@3.6,46.3 R35.1@6.1,46.3 ; J3.3@3.934,45.966 cw(c4.742,45.158) 4.742,46.3 cw(c4.742,47.442) J3.3@3.934,46.634 ; R35.1@5.942,46.142 ccw(c5.562,45.762) 5.562,46.3 ccw(c5.562,46.838) R35.1@5.942,46.458
NetJ3_4: J3.4 R36.1 | length 5.1
  Bottom Layer w0.254: J3.4@3.6,44.3 R36.1@6.1,44.3 ; J3.4@3.934,43.966 cw(c4.742,43.158) 4.742,44.3 cw(c4.742,45.442) J3.4@3.934,44.634 ; R36.1@5.942,44.142 ccw(c5.562,43.762) 5.562,44.3 ccw(c5.562,44.838) R36.1@5.942,44.458
NetR10_1: R10.1 R11.2 U3.4 | length 10.8
  Top Layer w1.016: R11.2@7.7,16.2 R10.1@10.1,16.2 10.1,17.7 v3(11.7,19.3)
  Bottom Layer w1.016: v3(11.7,19.3) 11.707,19.307 U3.4@16.324,19.307
NetR16_1: R16.1 U2.14 | length 4.4
  Bottom Layer w0.254: R16.1@81.014,82 81.595,82.581 U2.14@81.595,84.7 ; R16.1@81.114,82.223 ccw(c81.114,82.52) R16.1@81.324,82.31 ; R16.1@81.337,82 cw(c82.117,82) 81.566,82.551 ; U2.14@81.473,83.778 cw(c81.177,83.482) 81.595,83.482 cw(c82.013,83.482) U2.14@81.717,83.778
NetR17_1: R17.1 U2.7 | length 14.6
  Bottom Layer w0.254: U2.7@86.563,90.832 ccw(c86.355,91.075) 86.675,91.075 ; U2.7@86.594,90.697 cw(c87.254,90.72) 86.787,91.187 ; U2.7@86.675,89.9 86.675,91.075 ; U2.7@86.787,90.832 cw(c86.995,91.075) 86.675,91.075 ; U2.7@86.848,90.706 cw(c88.052,90.748) 87.2,91.6 ; R17.1@89.8,85.595 91,86.795 91,90.9 90.3,91.6 87.2,91.6 ; R17.1@90.123,85.55 cw(c91.012,85.55) 90.383,86.179 ; 86.675,91.075 87.2,91.6
NetR18_1: R18.1 U2.13 | length 4.2
  Bottom Layer w0.254: R18.1@82.714,82.158 ccw(c82.349,82.523) 82.865,82.523 ; U2.13@82.743,83.778 cw(c82.447,83.482) 82.865,83.482 cw(c83.283,83.482) U2.13@82.987,83.778 ; R18.1@82.771,82 82.865,82.094 U2.13@82.865,84.7 ; 82.865,82.554 ccw(c83.425,82.554) R18.1@83.029,82.158
NetR19_1: R19.1 U2.8 | length 2.9
  Bottom Layer w0.254: U2.8@87.945,89.9 88.695,90.65 R19.1@89.7,90.65 ; R19.1@89.442,90.492 ccw(c89.062,90.112) 89.062,90.65 ccw(c89.062,91.188) R19.1@89.442,90.808
NetR37_2: R37.2 U2.11 | length 4.6
  Bottom Layer w0.254: U2.11@85.283,83.778 cw(c84.987,83.482) 85.405,83.482 cw(c85.823,83.482) U2.11@85.527,83.778 ; U2.11@85.405,84.7 85.405,82.881 R37.2@86.286,82 ; 85.734,82.551 cw(c85.183,82) R37.2@85.963,82 ; R37.2@85.976,82.31 ccw(c86.186,82.52) R37.2@86.186,82.223
NetR38_2: R38.2 U2.10 | length 4.8
  Bottom Layer w0.254: U2.10@86.553,83.778 cw(c86.257,83.482) 86.675,83.482 cw(c87.093,83.482) U2.10@86.797,83.778 ; U2.10@86.675,84.7 86.675,83.368 R38.2@88.043,82 ; 87.491,82.551 cw(c86.94,82) R38.2@87.72,82 ; R38.2@87.733,82.31 ccw(c87.943,82.52) R38.2@87.943,82.223
NetR39_2: R39.2 U2.12 | length 6
  Bottom Layer w0.254: U2.12@84.013,83.778 cw(c83.717,83.482) 84.135,83.482 cw(c84.553,83.482) U2.12@84.257,83.778 ; 84.135,82.634 ccw(c85.062,82.634) R39.2@84.407,81.978 ; 84.135,83.247 ccw(c85.676,83.247) R39.2@84.586,82.158 ; U2.12@84.135,84.7 84.135,82.394 ; R39.2@84.216,82.066 ccw(c83.905,82.163) 84.135,82.394 ; R39.2@84.219,82.31 ccw(c84.429,82.52) R39.2@84.429,82.223 ; R39.2@84.529,82 84.135,82.394
NetR40_2: R40.2 U2.9 | length 6.4
  Bottom Layer w0.254: U2.9@87.842,83.761 cw(c87.688,83.555) 87.945,83.555 ; U2.9@87.864,83.9 ccw(c88.501,83.9) 88.051,83.449 ; U2.9@87.945,84.7 87.945,83.555 ; U2.9@88.048,83.761 ccw(c88.202,83.555) 87.945,83.555 ; U2.9@88.118,83.9 ccw(c89.369,83.9) 88.484,83.016 ; 88.978,82.522 ccw(c89.7,83.244) R40.2@89.7,82.223 ; R40.2@89.8,82 89.5,82 87.945,83.555
NRST: C7.1 U1.7 | length 7
  Top Layer w0.254: v1@81.6,26.2 82,26.6 83.77,26.6 C7.1@84.57,27.4 ; v1@81.777,26.15 cw(c82.325,26.15) 81.938,26.538 ; 84.019,26.849 ccw(c83.467,27.4) C7.1@84.247,27.4
  Bottom Layer w0.254: v1@81.56,26.06 cw(c81.343,25.843) 81.65,25.843 cw(c81.957,25.843) v1@81.74,26.06 ; v1@81.6,26.2 v1(81.65,26.15) U1.7@81.65,24.25
POWLED: R3.1 U1.27 | length 109.9
  Top Layer w0.254: R3.1@24.15,88.673 ccw(c24.688,88.673) 24.308,88.292 ; R3.1@24.181,88.773 24.181,88.419 27.1,85.5 47.2,85.5 48.7,87 72.2,87 73.4,85.8 73.4,80 77.2,76.2 v1(77.2,36.7) ; R3.1@24.404,88.673 ccw(c25.556,88.673) 24.741,87.859 ; v1@77.11,36.79 ccw(c76.893,37.007) 77.2,37.007 ccw(c77.507,37.007) v1@77.29,36.79
  Bottom Layer w0.254: v1(77.2,36.7) 77.2,36.646 80.15,33.696 U1.27@80.15,32.75 ; v1@77.327,36.7 ccw(c77.765,36.7) 77.455,36.39
RS232_RX1: C27.1 D9.1 J1.3 R18.2 | length 79.1
  Bottom Layer w0.254: J1.3@35.246,87.486 ccw(c34.012,88.72) 35.757,88.72 ccw(c37.503,88.72) J1.3@36.269,87.486 ; J1.3@35.426,87.307 ccw(c34.625,88.107) 35.757,88.107 ccw(c36.89,88.107) J1.3@36.089,87.307 ; J1.3@35.757,86.975 35.757,89.057 37.5,90.8 C27.1@42,90.8 43.6,90.8 ; C27.1@41.728,90.678 ccw(c41.432,90.382) 41.432,90.8 ccw(c41.432,91.218) C27.1@41.728,90.922 ; C27.1@42.272,90.678 cw(c42.568,90.382) 42.568,90.8 cw(c42.568,91.218) C27.1@42.272,90.922 ; D9.1@43.827,91.808 cw(c42.916,91.484) 43.6,90.8 ; 43.884,91.084 ccw(c43.336,91.633) D9.1@44.067,91.893 ; D9.1@44.029,91.229 cw(c44.638,90.62) D9.1@44.645,91.481 ; D9.1@44.643,91.227 ccw(c44.631,89.769) 43.6,90.8 ; D9.1@45.15,91.227 cw(c45.15,89.723) 46.214,90.786 ; D9.1@45.15,91.481 cw(c45.15,90.59) D9.1@45.78,91.22 ; D9.1@45.515,92.1 ccw(c47,92.1) 45.95,91.05 ; D9.1@45.769,92.1 ccw(c47.867,92.1) 46.383,90.617 ; D9.1@46.023,92.1 ccw(c48.734,92.1) 46.817,90.183 ; 82.22,79.849 ccw(c81.669,80.4) R18.2@82.448,80.4 ; R18.2@82.461,80.09 cw(c82.671,79.88) R18.2@82.671,80.177 ; R18.2@82.771,80.4 81.271,78.9 76.053,78.9 75.143,79.811 75.143,88.957 74.1,90 47,90 D9.1@44.9,92.1 43.6,90.8
RS232_RX2: C28.1 D8.1 J2.1 R19.2 | length 100.6
  Top Layer w0.254: v1@90.71,82.31 cw(c89.907,81.507) 91.043,81.507 ; v1@90.8,82.273 cw(c90.8,81.966) 91.017,82.183 cw(c91.234,82.4) v1@90.927,82.4 ; v1(90.8,82.4) 91.043,82.157 91.043,26.682 92.113,25.612 92.113,18.287 92.9,17.5 ; v1@90.89,82.49 cw(c90.52,82.12) 91.043,82.12 ; D8.1@93.392,17.17 ccw(c92.9,16.969) 92.9,17.5 ; D8.1@93.392,17.83 cw(c92.9,18.031) 92.9,17.5 ; D8.1@94.2,17.5 92.9,17.5
  Top Layer w0.762: C28.1@92.9,13.842 cw(c96.266,13.842) D8.1@94.521,16.721 ; C28.1@92.9,14.1 92.9,16.2 ; 92.9,15.196 cw(c95.446,15.196) D8.1@94.126,17.372 ; 92.9,16.549 cw(c94.625,16.549) D8.1@93.731,18.024 ; D8.1@93.32,16.62 ccw(c92.69,17.25) D8.1@93.581,17.25 ; D8.1@94.133,16.635 ccw(c93.97,15.13) 92.9,16.2 ; D8.1@94.638,17.312 cw(c95.477,16.473) 95.477,17.66 ; D8.1@94.638,18.188 ccw(c95.912,19.462) 95.912,17.66 ; J2.1@96.768,17.328 ccw(c95.968,16.528) 95.968,17.66 ccw(c95.968,18.792) J2.1@96.768,17.992 ; J2.1@97.1,17.66 94.36,17.66 D8.1@94.2,17.5 92.9,16.2
  Bottom Layer w0.254: 89.113,88.413 ccw(c88.477,89.05) R19.2@89.377,89.05 ; R19.2@89.7,89 88.8,88.1 88.8,83.4 89.3,82.9 90.3,82.9 v1(90.8,82.4) ; v1@90.673,82.4 ccw(c90.366,82.4) 90.583,82.617 ccw(c90.8,82.834) v1@90.8,82.527
RS232_TX1: C25.2 D6.2 J1.2 R16.2 | length 82.2
  Bottom Layer w0.254: J1.2@32.706,87.486 ccw(c31.472,88.72) 33.217,88.72 ccw(c34.963,88.72) J1.2@33.729,87.486 ; J1.2@32.886,87.307 ccw(c32.085,88.107) 33.217,88.107 ccw(c34.35,88.107) J1.2@33.549,87.307 ; J1.2@33.217,86.975 33.217,90.717 36.5,94 47.2,94 ; 47.63,93.57 cw(c46.177,92.118) D6.2@48.231,92.104 ; 47.786,93.414 ccw(c48.85,94.477) D6.2@48.85,92.973 ; D6.2@47.977,92.106 ccw(c45.324,92.124) 47.2,94 ; 48.059,93.141 cw(c47.03,92.112) D6.2@48.485,92.102 ; D6.2@48.22,92.98 ccw(c48.85,93.61) D6.2@48.85,92.719 ; D6.2@49.897,91.81 cw(c50.378,91.556) 50.378,92.1 cw(c50.378,92.644) D6.2@49.897,92.39 ; D6.2@50.122,91.692 cw(c50.8,91.332) 50.8,92.1 ; D6.2@50.122,92.508 ccw(c50.8,92.868) 50.8,92.1 ; 51.549,91.351 cw(c50.997,90.8) C25.2@51.777,90.8 ; C25.2@52.193,90.743 ccw(c52.779,91.329) 52.779,90.5 ; C25.2@52.372,90.922 ccw(c53.392,91.942) 53.392,90.5 ; 80.463,79.849 ccw(c79.911,80.4) R16.2@80.691,80.4 ; R16.2@80.704,80.09 cw(c80.914,79.88) R16.2@80.914,80.177 ; R16.2@81.014,80.4 79.971,79.357 76.243,79.357 75.6,80 75.6,89.2 74.3,90.5 52.4,90.5 C25.2@52.1,90.8 50.8,92.1 ; 47.2,94 D6.2@49.1,92.1 50.8,92.1
RS232_TX2: C26.2 D7.2 J2.2 R17.2 | length 82.3
  Top Layer w0.254: 91.449,82.271 cw(c91.929,82.271) v1@91.59,82.61 ; v1(91.5,82.7) 91.449,82.649 91.449,26.851 92.9,25.4 C26.2@92.9,24.6 ; C26.2@92.778,24.872 ccw(c92.482,25.168) 92.9,25.168 ccw(c93.318,25.168) C26.2@93.022,24.872
  Top Layer w0.762: 92.9,23.548 ccw(c94.725,23.548) D7.2@94.155,21.814 ; D7.2@93.32,22.58 cw(c92.69,21.95) D7.2@93.581,21.95 ; D7.2@94.133,22.565 cw(c93.97,24.07) 92.9,23 ; D7.2@94.2,20.831 cw(c94.2,18.733) 95.683,20.217 ; D7.2@94.393,22.538 cw(c95.07,24.6) C26.2@92.9,24.6 92.9,23 ; D7.2@94.819,21.45 ccw(c95.71,21.45) D7.2@95.08,20.82 ; J2.2@96.768,19.868 ccw(c95.968,19.068) 95.968,20.2 ccw(c95.968,21.332) J2.2@96.768,20.532 ; J2.2@97.1,20.2 95.7,20.2 D7.2@94.2,21.7 92.9,23
  Bottom Layer w0.254: R17.2@89.8,83.95 90.25,83.95 v1(91.5,82.7) ; R17.2@89.9,83.727 cw(c89.9,82.344) 90.878,83.322 ; R17.2@89.9,83.981 cw(c89.9,83.211) 90.445,83.755 ; v1@91.373,82.7 ccw(c91.066,82.7) 91.283,82.917 ccw(c91.5,83.134) v1@91.5,82.827
SPARE1: R5.1 U1.10 | length 20.4
  Top Layer w0.254: v1(81,21.8) 86.9,21.8 v1(90.9,25.8) ; v1@81.09,21.71 cw(c81.307,21.493) 81.307,21.8 cw(c81.307,22.107) v1@81.09,21.89 ; v1@90.773,25.8 cw(c90.466,25.8) 90.683,25.583 cw(c90.9,25.366) v1@90.9,25.673
  Bottom Layer w0.254: U1.10@80.15,24.25 80.15,22.65 v1(81,21.8) ; v1@80.873,21.8 ccw(c80.566,21.8) 80.783,22.017 ccw(c81,22.234) v1@81,21.927 ; v1(90.9,25.8) 91.2,26.1 R5.1@94,26.1 ; v1@90.9,25.927 ccw(c90.9,26.234) 91.117,26.017 ccw(c91.334,25.8) v1@91.027,25.8 ; R5.1@93.842,25.942 ccw(c93.462,25.562) 93.462,26.1 ccw(c93.462,26.638) R5.1@93.842,26.258
SPARE2: R6.1 U1.38 | length 9.2
  Bottom Layer w0.254: U1.38@86.15,30.75 92.85,30.75 R6.1@94,31.9 ; 93.449,31.349 cw(c94,30.797) R6.1@94,31.577 ; R6.1@93.69,31.59 ccw(c93.48,31.8) R6.1@93.777,31.8
SPARE3: R7.1 U1.39 | length 8.6
  Bottom Layer w0.254: U1.39@86.15,30.25 93.8,30.25 R7.1@94,30.45 ; 93.22,30.25 ccw(c93.22,31.13) R7.1@93.842,30.508
SPARE4: R8.1 U1.40 | length 9
  Bottom Layer w0.254: U1.40@86.15,29.75 93.25,29.75 R8.1@94,29 ; 93.449,29.551 ccw(c94,30.103) R8.1@94,29.323 ; R8.1@93.69,29.31 cw(c93.48,29.1) R8.1@93.777,29.1
SPARE5: R9.1 U1.41 | length 9.4
  Bottom Layer w0.254: U1.41@86.15,29.25 92.3,29.25 R9.1@94,27.55 ; 93.449,28.101 ccw(c94,28.653) R9.1@94,27.873 ; R9.1@93.69,27.86 cw(c93.48,27.65) R9.1@93.777,27.65
SWCLK: J4.2 U1.37 | length 20.6
  Bottom Layer w0.305: U1.37@86.15,31.25 87.8,32.9 99.1,32.9 99.6,33.4 99.6,35 J4.2@98.4,36.2 ; U1.37@86.343,31.25 cw(c86.808,31.25) 86.479,31.579 ; U1.37@86.648,31.25 cw(c87.849,31.25) 86.999,32.099 ; J4.2@98.4,35.752 cw(c98.4,34.672) 99.164,35.436 cw(c99.928,36.2) J4.2@98.848,36.2
SWDIO: J4.4 U1.34 | length 21.4
  Bottom Layer w0.254: U1.34@83.65,32.75 83.65,35.75 88.1,40.2 J4.4@98.4,40.2 ; J4.4@98.066,39.866 ccw(c97.258,39.058) 97.258,40.2 ccw(c97.258,41.342) J4.4@98.066,40.534
TESTLED1: R1.1 U1.29 | length 60.6
  Top Layer w0.254: R1.1@74.043,88.388 cw(c73.662,88.008) 74.2,88.008 cw(c74.739,88.008) R1.1@74.358,88.388 ; R1.1@74.2,88.646 74.2,86.83 74.73,86.3 74.73,81.1 78.7,77.13 v1(78.7,36.7) ; v1@78.61,36.79 ccw(c78.393,37.007) 78.7,37.007 ccw(c79.007,37.007) v1@78.79,36.79
  Bottom Layer w0.254: v1@78.7,36.573 cw(c78.7,36.266) 78.917,36.483 cw(c79.134,36.7) v1@78.827,36.7 ; v1(78.7,36.7) 81.15,34.25 U1.29@81.15,32.75
TESTLED2: R2.1 U1.28 | length 83.9
  Top Layer w0.254: R2.1@49.2,88.323 cw(c49.2,87.543) 49.751,88.095 ; R2.1@49.2,88.646 50.046,87.8 72.475,87.8 74.1,86.175 74.1,80.5 77.9,76.7 v1(77.9,36.7) ; R2.1@49.423,88.546 ccw(c49.72,88.546) R2.1@49.51,88.336 ; v1@77.81,36.79 ccw(c77.593,37.007) 77.9,37.007 ccw(c78.207,37.007) v1@77.99,36.79
  Bottom Layer w0.254: v1@77.9,36.573 cw(c77.9,36.266) 78.117,36.483 cw(c78.334,36.7) v1@78.027,36.7 ; v1(77.9,36.7) 80.65,33.95 U1.28@80.65,32.75
TTL1_RX: R39.1 U1.31 | length 61.8
  Top Layer w0.254: v1(82.3,31.1) 83.7,31.1 88.9,36.3 88.9,77.4 v1(87.323,78.977) ; v1@82.39,31.01 cw(c82.607,30.793) 82.607,31.1 cw(c82.607,31.407) v1@82.39,31.19 ; v1@87.323,78.85 cw(c87.323,78.543) 87.54,78.76 cw(c87.757,78.977) v1@87.45,78.977
  Bottom Layer w0.254: 82.15,31.769 ccw(c82.969,31.769) v1@82.39,31.19 ; U1.31@82.15,32.75 82.15,31.25 v1(82.3,31.1) ; R39.1@84.529,80.4 85.055,80.4 ; R39.1@84.629,80.177 cw(c84.629,78.61) 85.737,79.718 ; R39.1@84.629,80.431 cw(c84.629,79.477) 85.303,80.152 ; R39.1@84.812,80.273 cw(c85.055,80.104) 85.055,80.4 ; R39.1@84.812,80.527 ccw(c85.055,80.696) 85.055,80.4 ; v1@87.233,78.887 ccw(c87.017,78.67) 87.017,78.977 ccw(c87.017,79.283) v1@87.233,79.067 ; v1(87.323,78.977) 86.478,78.977 85.055,80.4
TTL1_TX: R37.1 U1.30 | length 61.9
  Top Layer w0.254: v1@81.31,31.21 cw(c81.093,30.993) 81.4,30.993 cw(c81.707,30.993) v1@81.49,31.21 ; v1(81.4,31.3) 81.4,30.7 81.6,30.5 83.7,30.5 89.306,36.106 89.306,77.919 v1(88.249,78.977) ; v1@88.249,78.85 cw(c88.249,78.543) 88.466,78.76 cw(c88.682,78.977) v1@88.376,78.977
  Bottom Layer w0.254: v1@81.31,31.39 ccw(c80.49,32.21) U1.30@81.65,32.21 ; v1(81.4,31.3) 81.65,31.55 U1.30@81.65,32.75 ; v1@81.49,31.21 ccw(c81.103,31.597) 81.65,31.597 ; R37.1@86.286,80.4 86.286,80.314 87.064,79.536 87.69,79.536 v1(88.249,78.977) ; R37.1@86.609,80.4 ccw(c87.595,80.4) 86.898,79.702 ; v1@88.122,78.977 ccw(c87.815,78.977) 88.032,79.194 ccw(c88.249,79.41) v1@88.249,79.104
TTL2_RX: R40.1 U1.13 | length 74.7
  Top Layer w0.254: v1@77.21,24.01 cw(c76.993,23.793) 77.3,23.793 cw(c77.607,23.793) v1@77.39,24.01 ; v1(77.3,24.1) 77.3,23.3 78.106,22.494 86.868,22.494 90.119,25.744 90.119,78.958 v1(90.1,78.977) ; v1@90.01,78.887 cw(c89.747,78.624) 90.119,78.624 ; 90.119,78.716 cw(c90.36,78.716) v1@90.19,78.887
  Bottom Layer w0.254: v1@77.21,24.19 ccw(c76.993,24.407) 77.3,24.407 ccw(c77.607,24.407) v1@77.39,24.19 ; v1(77.3,24.1) 77.3,25.4 U1.13@77.65,25.75 ; R40.1@89.642,80.242 cw(c89.262,79.862) 89.8,79.862 cw(c90.338,79.862) R40.1@89.958,80.242 ; R40.1@89.8,80.4 89.8,79.277 v1(90.1,78.977) ; v1@89.973,78.977 ccw(c89.666,78.977) 89.883,79.194 ccw(c90.1,79.41) v1@90.1,79.104
TTL2_TX: R38.1 U1.12 | length 73.3
  Top Layer w0.254: v1(78.3,23.6) 78.3,23.5 78.9,22.9 86.7,22.9 89.713,25.913 89.713,78.438 v1(89.174,78.977) ; v1@78.427,23.6 ccw(c78.975,23.6) 78.588,23.212 ; v1@89.174,78.85 cw(c89.174,78.543) 89.391,78.76 cw(c89.608,78.977) v1@89.301,78.977
  Bottom Layer w0.254: v1@78.21,23.69 ccw(c77.993,23.907) 78.3,23.907 ccw(c78.607,23.907) v1@78.39,23.69 ; v1(78.3,23.6) 78.3,24 78.55,24.25 U1.12@79.15,24.25 ; R38.1@88.043,80.4 88.043,80.108 v1(89.174,78.977) ; R38.1@88.112,80.4 ccw(c88.983,80.4) 88.367,79.784 ; R38.1@88.366,80.4 ccw(c89.85,80.4) 88.801,79.351 ; v1@89.047,78.977 ccw(c88.741,78.977) 88.958,79.194 ccw(c89.174,79.41) v1@89.174,79.104
TTL3_RX: R35.2 U1.22 | length 89.4
  Top Layer w0.254: v1(8.6,46.3) v1(12.2,46.3) ; v1@8.69,46.21 cw(c8.907,45.993) 8.907,46.3 cw(c8.907,46.607) v1@8.69,46.39 ; v1@12.11,46.21 ccw(c11.893,45.993) 11.893,46.3 ccw(c11.893,46.607) v1@12.11,46.39 ; v1@74.4,46.173 cw(c74.4,45.866) 74.617,46.083 cw(c74.834,46.3) v1@74.527,46.3 ; v1(74.4,46.3) 75,45.7 v1(75,36.7) ; v1@74.91,36.79 ccw(c74.693,37.007) 75,37.007 ccw(c75.307,37.007) v1@75.09,36.79
  Bottom Layer w0.254: R35.2@7.7,46.3 v1(8.6,46.3) ; R35.2@7.858,46.142 cw(c8.238,45.762) 8.238,46.3 cw(c8.238,46.838) R35.2@7.858,46.458 ; v1@8.51,46.21 ccw(c8.293,45.993) 8.293,46.3 ccw(c8.293,46.607) v1@8.51,46.39 ; v1(12.2,46.3) v1(74.4,46.3) ; v1@12.29,46.21 cw(c12.507,45.993) 12.507,46.3 cw(c12.507,46.607) v1@12.29,46.39 ; v1@74.31,46.21 ccw(c74.093,45.993) 74.093,46.3 ccw(c74.093,46.607) v1@74.31,46.39 ; v1@74.91,36.61 cw(c74.693,36.393) 75,36.393 cw(c75.307,36.393) v1@75.09,36.61 ; v1(75,36.7) 75,31.8 76.55,30.25 U1.22@77.65,30.25
TTL3_TX: R36.2 U1.21 | length 89.9
  Top Layer w0.254: v1(8.6,44.3) 10.9,44.3 v1(12.2,45.6) ; v1@8.69,44.21 cw(c8.907,43.993) 8.907,44.3 cw(c8.907,44.607) v1@8.69,44.39 ; v1@12.073,45.6 cw(c11.766,45.6) 11.983,45.383 cw(c12.2,45.166) v1@12.2,45.473 ; v1@74.11,36.79 ccw(c73.893,37.007) 74.2,37.007 ccw(c74.507,37.007) v1@74.29,36.79 ; v1@74.11,44.91 cw(c73.893,44.693) 74.2,44.693 cw(c74.507,44.693) v1@74.29,44.91 ; v1(74.2,36.7) v1(74.2,45)
  Bottom Layer w0.254: R36.2@7.7,44.3 v1(8.6,44.3) ; R36.2@7.858,44.142 cw(c8.238,43.762) 8.238,44.3 cw(c8.238,44.838) R36.2@7.858,44.458 ; v1@8.51,44.21 ccw(c8.293,43.993) 8.293,44.3 ccw(c8.293,44.607) v1@8.51,44.39 ; v1(12.2,45.6) 73.6,45.6 v1(74.2,45) ; v1@12.29,45.51 cw(c12.507,45.293) 12.507,45.6 cw(c12.507,45.907) v1@12.29,45.69 ; v1@74.073,45 ccw(c73.766,45) 73.983,45.217 ccw(c74.2,45.434) v1@74.2,45.127 ; v1@74.11,36.61 cw(c73.893,36.393) 74.2,36.393 cw(c74.507,36.393) v1@74.29,36.61 ; v1(74.2,36.7) 74.2,31.1 75.55,29.75 U1.21@77.65,29.75
XTAL: U1.5 Y1.3 | length 5
  Bottom Layer w0.254: Y1.3@82.28,21.62 ccw(c81.387,22.513) 82.65,22.513 ccw(c83.913,22.513) Y1.3@83.02,21.62 ; U1.5@82.65,24.25 82.65,21.35 Y1.3@82.75,21.25
pads on no net: K1.2 K1.7 R5.2 R6.2 R7.2 R8.2 R9.2 U1.2 U1.3 U1.4 U1.6 Y1.1

## Keep-outs
Keep-Out Layer:
  the board outline again, w0.127

## Silkscreen, mask and mechanical layers (free items; w line width, h text height)
Bottom Overlay:
  lines w0.127: 15.7,26.9 55,26.9 55,85.6 15.7,85.6 15.7,26.9